# EAGLE board UniRF-Rev01 (EAGLE 7.3.0)
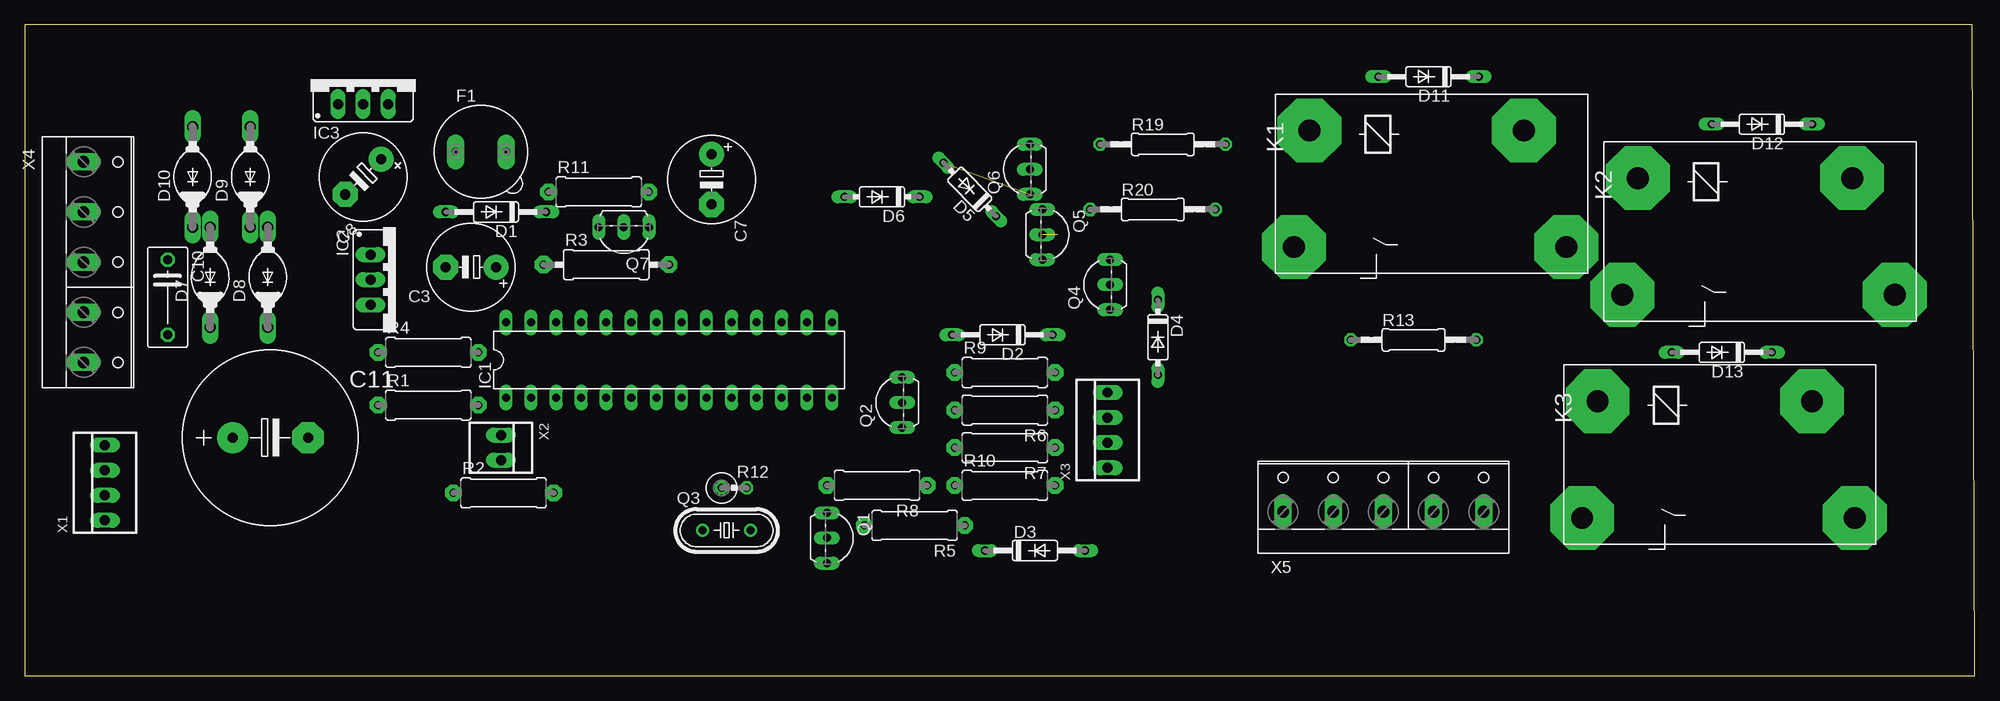
[diagram p0: board, top side]
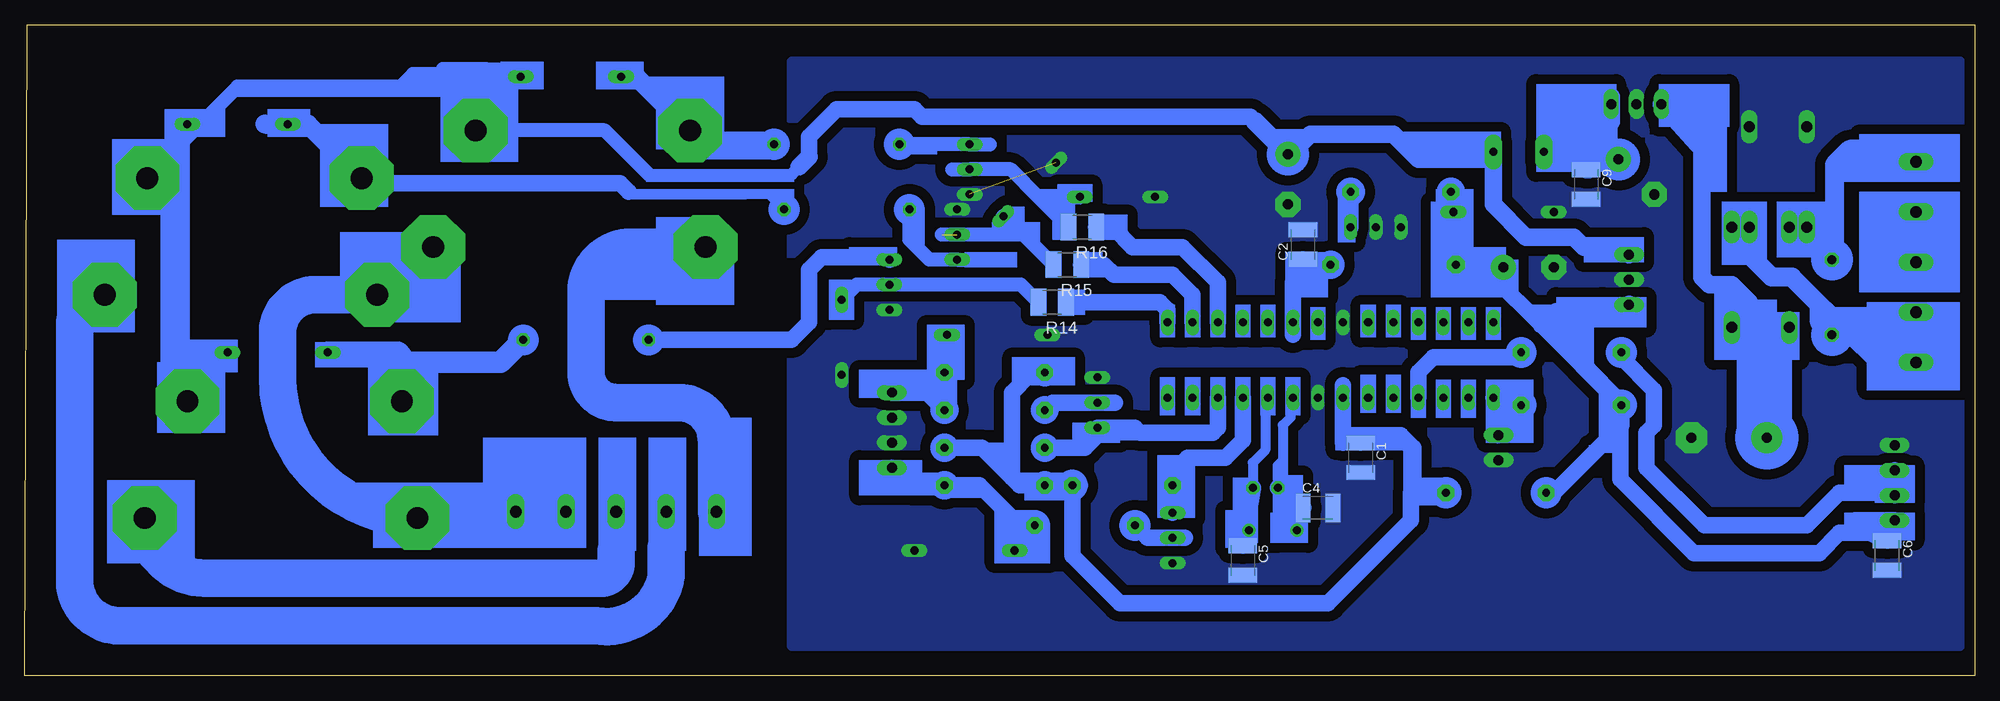
[diagram p1: board, bottom side, seen from below]

Size 197.59 x 65.96 mm. Coordinates in mm from the lower left corner, seen from the top.
Outline: 0,0 197.59,0 197.34,65.96 0,65.96 0,0
Copper layers (1*16): Top 0.035mm / dielectric 1.5mm / Bottom 0.035mm
Design rules "default": minimum track width 10mil, minimum drill 24mil, track to track 8mil, track to pad 8mil, pad to pad 8mil, via to via 8mil, smd to smd 8mil, copper to edge 40mil, drill to drill 8mil, minimum pad ring 10mil, minimum via ring 8mil, stop-mask expansion 4mil, vias tented up to drill 0mil, thermal gap 10mil

## Footprints (pad centres in the part's own frame; a part is rotated, then mirrored left to right if it is on the bottom)
C1210K = smd 1.5 x 2.9: 1 -1.5,0; 2 1.5,0
E5-8,5 = drill 1.016 pad 2.54: + -2.54,0 | drill 1.016 pad 2.54 octagon: - 2.54,0
C075-042X103 = drill 0.914 octagon: 1 -3.81,0; 2 3.81,0
E7,5-18 = drill 1.016 pad 3.15: + -3.81,0 | drill 1.016 pad 3.15 octagon: - 3.81,0
DO35-10 = drill 0.813 long: A 5.08,0; C -5.08,0
DO35-7 = drill 0.813 long: A 3.81,0; C -3.81,0
DO204-10 = drill 1.118 long: A 5.08,0; C -5.08,0
19560 = drill 0.813 pad 1.778 long: 1 -2.54,0; 2 2.54,0
DIL28-3 = drill 0.813 long: 1 -16.51,-3.81; 2 -13.97,-3.81; 3 -11.43,-3.81; 4 -8.89,-3.81; 5 -6.35,-3.81; 6 -3.81,-3.81; 7 -1.27,-3.81; 8 1.27,-3.81; 9 3.81,-3.81; 10 6.35,-3.81; 11 8.89,-3.81; 12 11.43,-3.81; 13 13.97,-3.81; 14 16.51,-3.81; 15 16.51,3.81; 16 13.97,3.81; 17 11.43,3.81; 18 8.89,3.81; 19 6.35,3.81; 20 3.81,3.81; 21 1.27,3.81; 22 -1.27,3.81; 23 -3.81,3.81; 24 -6.35,3.81; 25 -8.89,3.81; 26 -11.43,3.81; 27 -13.97,3.81; 28 -16.51,3.81
78XXS = drill 1.016 long: GND 0,-2.54; IN -2.54,-2.54; OUT 2.54,-2.54
G2RA = drill 2.2 pad 6.452 octagon: 1 -0.762,-5.461; 2 -5.08,6.35; P 22.53,6.35; S 20.955,-5.461
TO92-EBC = drill 0.813 long: B 0,-1.27; C -2.54,-1.27; E 2.54,-1.27
HC49/S = drill 0.813: 1 -2.413,0; 2 2.413,0
0309/10 = drill 0.8 pad 1.676 octagon: 1 -5.08,0; 2 5.08,0
0309/12 = drill 0.8 pad 1.778 octagon: 1 -6.35,0 | drill 0.8 pad 1.676 octagon: 2 6.35,0
0309V = drill 0.813 octagon: 1 -1.27,0; 2 1.27,0
0207/12 = drill 0.813 octagon: 1 -6.35,0; 2 6.35,0
R1210 = smd 1.6 x 2.7: 1 -1.4,0; 2 1.4,0
22-23-2041 = drill 1 long: 1 -3.81,0; 2 -1.27,0; 3 1.27,0; 4 3.81,0
22-23-2021 = drill 1 long: 1 -1.27,0; 2 1.27,0
W237-5P = drill 1.194 long: 1 -10.16,-0.635; 2 -5.08,-0.635; 3 0,-0.635; 4 5.08,-0.635; 5 10.16,-0.635

## Placement (x,y rotation side)
C1  .1  [C1210K]  62.23,22.1 270 bottom
C2  .1  [C1210K]  68.07,43.69 90 bottom
C3  47uF  [E5-8,5]  45.21,41.4 180 top
C4  22pF  [C1210K]  66.55,17.02 0 bottom
C5  22pF  [C1210K]  74.17,11.68 270 bottom
C6  .1  [C1210K]  8.89,12.19 270 bottom
C7  47uF  [E5-8,5]  69.6,50.29 270 top
C8  47uF  [E5-8,5]  34.29,50.55 224.6 top
C9  .1  [C1210K]  39.37,49.78 270 bottom
C10  .1  [C075-042X103]  14.48,38.35 270 top
C11  2200uF  [E7,5-18]  24.89,24.13 0 top
D1  TVS_5V  [DO35-10]  47.75,46.99 180 top
D2  TVS_5V  [DO35-10]  99.06,34.54 180 top
D3  TVS_5V  [DO35-10]  102.36,12.7 0 top
D4  9V1  [DO35-7]  114.81,34.29 270 top
D5  9V1  [DO35-7]  95.76,49.28 134.6 top
D6  9V1  [DO35-7]  86.87,48.51 180 top
D7  4007  [DO204-10]  18.8,40.39 90 top
D8  4007  [DO204-10]  24.64,40.39 90 top
D9  4007  [DO204-10]  22.86,50.55 90 top
D10  4007  [DO204-10]  17.02,50.55 90 top
D11  4007  [DO35-10]  142.24,60.71 180 top
D12  4007  [DO35-10]  176.02,55.88 180 top
D13  4007  [DO35-10]  171.96,32.77 180 top
F1  1A  [19560]  46.23,53.09 0 top
IC1  ATmega328p  [DIL28-3]  65.28,32 0 top
IC2  7805  [78XXS]  37.59,40.13 270 top
IC3  7812  [78XXS]  34.29,60.45 0 top
K1  ALF1P12  [G2RA]  151.13,49.78 180 top
K2  ALF1P12  [G2RA]  184.4,44.96 180 top
K3  ALF1P12  [G2RA]  180.34,22.35 180 top
Q1  BC546  [TO92-EBC]  82.55,13.97 270 top
Q2  BC546  [TO92-EBC]  87.63,27.69 90 top
Q3  16MHz  [HC49/S]  71.12,14.73 0 top
Q4  2106  [TO92-EBC]  108.71,39.62 90 top
Q5  2106  [TO92-EBC]  104.39,44.7 270 top
Q6  2106  [TO92-EBC]  100.58,51.31 90 top
Q7  3LED  [TO92-EBC]  60.71,44.2 180 top
R1  10K  [0309/10]  40.89,27.43 0 top
R2  BEAD  [0309/10]  48.51,18.54 0 top
R3  BEAD  [0309/12]  58.93,41.66 0 top
R4  100  [0309/10]  40.89,32.77 0 top
R5  330  [0309/10]  90.17,15.24 180 top
R6  330  [0309/10]  99.31,26.92 180 top
R7  1K  [0309/10]  99.31,23.11 180 top
R8  1K  [0309/10]  86.36,19.3 180 top
R9  470  [0309/10]  99.31,30.73 0 top
R10  470  [0309/10]  99.31,19.3 0 top
R11  2K7  [0309/10]  58.17,49.02 0 top
R12  1M  [0309V]  71.88,19.05 0 top
R13  0  [0207/12]  140.72,34.04 0 top
R14  1K  [R1210]  93.47,37.85 180 bottom
R15  1K  [R1210]  91.95,41.66 180 bottom
R16  1K  [R1210]  90.42,45.47 180 bottom
R19  0  [0207/12]  115.32,53.85 0 top
R20  0  [0207/12]  114.3,47.24 0 top
X1  RX_MOD  [22-23-2041]  8.13,19.56 90 top
X2  RESET  [22-23-2021]  48.26,23.11 270 top
X3  SWITCH  [22-23-2041]  109.73,24.89 90 top
X4  [W237-5P]  6.6,41.91 270 top
X5  [W237-5P]  137.67,17.27 0 top

## Library data of the parts
C1-C11 R1-R16 R19 R20 = resistor
D1-D13 = diode
F1 = fuse; MPN: 56000001009; OC_FARNELL: 1185363; OC_NEWARK: 15P8392
IC1 = ic-package
IC2 IC3 = v-reg
K1-K3 = relay; OC_FARNELL: unknown; OC_NEWARK: unknown
Q1 Q2 Q4-Q7 = transistor-npn
Q3 = crystal; OC_FARNELL: 1667008; OC_NEWARK: unknown
X1 X3 = con-molex; MF: MOLEX; MPN: 22-23-2041; OC_FARNELL: 1462920; OC_NEWARK: 38C0355
X2 = con-molex; MF: MOLEX; MPN: 22-23-2021; OC_FARNELL: 1462926; OC_NEWARK: 25C3832
X4 X5 = con-wago-508; OC_FARNELL: unknown; OC_NEWARK: unknown

## Nets
GND: C1.2 C2.2 C3.- C4.2 C5.2 C6.2 C7.- C8.- C9.2 C11.- D1.A D2.A D3.A D4.A D5.A D6.A D9.A D10.A IC1.8 IC1.22 IC2.GND IC3.GND Q1.E Q2.E Q4.C Q5.C Q6.C Q7.B Q7.E X1.4 X2.2 X3.2 X3.3
N$1: D4.C Q4.B R14.2
N$2: IC1.1 R1.2 X2.1
N$3: IC1.4 R4.2
N$4: C2.1 IC1.20 R3.2
N$5: R4.1 X1.2 X1.3
N$7: IC1.11 Q1.C R8.2
N$8: Q1.B R5.2
N$9: C3.+ C6.1 D1.C IC2.OUT R1.1 R2.1 R3.1 R11.1 X1.1
N$10: Q2.B R6.2
N$11: IC1.12 Q2.C R7.2
N$12: C1.1 IC1.7 R2.2 R7.1 R8.1 R9.1 R10.1
N$13: C4.1 IC1.9 Q3.1 R12.1
N$14: C5.1 IC1.10 Q3.2 R12.2
N$15: D3.C R5.1 R10.2 X3.1
N$16: D2.C R6.1 R9.2 X3.4
N$17: D6.C Q6.B R16.2
N$18: IC1.15 R14.1
N$19: IC1.16 R15.1
N$20: IC1.17 R16.1
N$21: D5.C Q5.B R15.2
N$22: Q7.C R11.2
N$24: C7.+ D11.C D12.C D13.C F1.2 IC2.IN K1.1 K2.1 K3.1
N$25: C8.+ C9.1 F1.1 IC3.OUT
N$26: C10.2 D8.A D9.C X4.4 X4.5
N$27: Q4.E R13.1
N$28: Q5.E R20.1
N$29: Q6.E R19.1
N$30: C10.1 D7.A D10.C X4.1
N$31: C11.+ D7.C D8.C IC3.IN
N$32: D13.A K3.S R13.2
N$33: D11.A K1.S R19.2
N$36: K2.2 X5.2
N$37: X4.2 X4.3
N$38: D12.A K2.S R20.2
N$39: K1.P X5.1
N$42: K3.2 X5.3
N$43: K1.2 K2.P K3.P X5.4 X5.5

## Tracks (layer width: path | path; a pad name or v marks a point on that pad's centre or on a via)
GND  (1 unrouted)
  pour Bottom (isolate 1.016, no thermals): 1.52,62.23 119.89,62.23 119.89,3.05 1.52,3.05
N$1
  Bottom 1.422: R14.2 96.65,39.62 Q4.B 113.28,39.62 D4.C
N$2
  Bottom 1.676: R1.2 46.74,28.19 48.01,28.19 | 48.01,28.19 IC1.1 | X2.1 48.01,24.64 48.01,28.19
N$3
  Bottom 1.676: IC1.4 56.39,30.73 54.86,32.26 46.48,32.26 R4.2
N$4
  Bottom 1.676: 69.09,34.54 IC1.20 69.09,39.88 68.07,40.89 | R3.2 66.04,40.89 68.07,40.89 | 68.07,40.89 C2.1
N$5
  Bottom 1.676: X1.2 X1.3 9.4,19.56 9.4,19.3 10.16,18.54 13.72,18.54 17.02,15.24 27.43,15.24 33.27,21.08 33.27,24.64 32.51,25.4 32.51,28.96 35.81,32.26 R4.1
N$6
  Bottom 1.676: 36.32,27.94 36.32,28.19 39.12,30.99
N$7
  Bottom 1.676: IC1.11 74.17,23.88 75.95,22.1 79.76,22.1 81.28,20.57 R8.2 Q1.C
N$8
  Bottom 1.676: 80.01,13.97 Q1.B 83.82,13.97 R5.2
N$9
  Bottom 1.676: R1.1 43.94,35.56 48.77,40.39 C3.+ R3.1 52.58,45.97 52.7,46.45 | R1.1 35.81,25.4 35.94,25.27 | 35.94,25.27 42.67,18.54 R2.1 | 52.7,46.45 D1.C 53.09,45.97 | 35.31,27.18 35.56,27.43 R1.1 | R11.1 52.7,49.02 52.7,46.45 | X1.1 12.17,15.75 C6.1 10.69,14.48 13.72,14.48 15.75,12.45 28.45,12.45 35.94,19.94 35.94,25.27
  Bottom 1.778: 42.42,36.83 43.69,35.56 43.94,35.56
  Bottom 1.93: IC2.OUT 35.81,36.83 42.42,36.83
N$10
  Bottom 1.676: 87.12,27.69 Q2.B 93.47,27.69 R6.2
N$11
  Bottom 1.676: R7.2 90.17,23.11 88.9,24.38 Q2.C 85.09,25.15 84.58,24.64 77.22,24.64 76.71,25.15 IC1.12
N$12
  Bottom 1.676: R7.1 100.58,23.11 97.54,20.07 | 97.54,20.07 96.77,19.3 R10.1 R8.1 | 97.54,20.07 97.54,28.7 95.76,30.48 94.49,30.48 R9.1 92.46,30.73 | R2.2 56.9,18.54 | 56.9,18.54 57.15,18.54 | 57.15,18.54 57.15,15.75 65.53,7.37 86.61,7.37 91.44,12.19 R8.1 | 63.75,23.88 63.25,24.38 | 63.25,24.38 61.72,24.38 | 61.72,24.38 58.42,24.38 | 58.42,24.38 58.17,24.38 56.9,23.11 56.9,22.86 | 56.9,18.8 56.9,18.54 | C1.1 61.72,24.11 61.72,24.38 | 64.01,29.46 IC1.7 64.01,23.62 63.75,23.88 | 63.75,23.88 63.75,24.13 63.5,24.38 63.25,24.38 | 58.42,24.38 56.9,22.86 | 56.9,22.86 56.9,18.8 | 56.9,18.8 57.15,18.54 | 90.68,19.3 R8.1
N$13
  Bottom 1.016: IC1.9 69.34,27.94 69.34,26.16 70.1,25.4 70.1,21.84 70.61,21.34 R12.1 70.61,18.8
  Bottom 1.676: R12.1 70.61,19.07 C4.1 69.83,14.83 Q3.1
N$14
  Bottom 1.016: IC1.10 71.88,28.19 71.88,22.86 73.15,21.59 R12.2
  Bottom 1.676: R12.2 C5.1 74.7,14.88 Q3.2
N$15
  Bottom 1.676: R5.1 96.58,14.5 | 96.58,14.5 D3.C | X3.1 107.95,19.3 R10.2 100.84,19.3 96.77,15.24 96.77,14.7 96.58,14.5
N$16
  Bottom 1.676: X3.4 106.17,28.7 R6.1 R9.2 104.14,30.99 D2.C
N$17
  Bottom 1.422: R16.2 94.81,48.45 | 94.81,48.45 97.67,51.31 Q6.B 103.63,51.31 | D6.C 90.74,48.45 94.81,48.45
N$18
  Bottom 1.676: R14.1 82.55,37.85 81.79,37.08 IC1.15
N$19
  Bottom 1.676: IC1.16 79.25,38.61 81.28,40.64 87.25,40.64 88.26,41.66 R15.1
N$20
  Bottom 1.676: IC1.17 76.71,39.88 80.26,43.43 85.34,43.43 87.25,45.34 R16.1
N$21  (1 unrouted)
  Bottom 1.422: R15.2 96.4,44.7 98.55,44.7 | D5.C 98.55,46.44 98.55,44.7 | 98.55,44.7 104.65,44.7
N$22
  Bottom 1.676: Q7.C R11.2
N$24
  Bottom 1.016: 119.89,50.8 134.37,50.8
  Bottom 1.27: 119.13,51.56 119.89,50.8
  Bottom 1.422: 134.37,50.8 138.81,55.25 K1.1 | D11.C 147.57,60.45 151.89,60.45 150.88,61.47 | 150.88,61.47 147.32,61.47 | 150.88,61.47 155.19,61.47 154.43,60.71 153.16,60.71 153.42,60.96 158.24,60.96 159.51,59.69 176.02,59.69 179.83,55.88 | 179.83,55.88 185.17,50.55 K2.1 | 179.83,55.88 D12.C
  Bottom 1.676: 72.9,56.13 73.41,56.64 106.68,56.64 107.44,57.4 115.32,57.4 118.11,54.61 118.11,52.58
  Bottom 1.778: IC2.IN 35.81,43.43 39.62,43.43 40.64,44.45 45.47,44.45 48.77,47.75 F1.2 49.53,52.32 56.39,52.32 58.93,54.86 67.31,54.86 69.34,52.83 C7.+ | 118.11,52.58 119.13,51.56
  Bottom 1.93: C7.+ 72.9,56.13 | K2.1 182.88,48.13 182.88,32.51 | 182.88,32.51 182.88,29.97 181.1,28.19 K3.1 | D13.C 177.8,32 182.12,32 181.36,32.77 177.29,32.77 177.55,32.51 182.88,32.51 | 151.89,60.45 K1.1
N$25
  Bottom 1.778: 37.08,53.31 C8.+ 36.86,53.09 F1.1 | 37.08,53.31 37.08,58.93 36.83,58.67 IC3.OUT 36.83,56.13 | 37.08,53.31 39.11,51.28 C9.1
N$26
  Bottom 1.93: C10.2 15.75,35.81 15.75,37.59 | 15.75,37.59 18.54,40.39 20.57,40.39 23.62,43.43 23.62,45.47 D9.C D8.A | X4.4 X4.5 7.75,29.97 15.75,37.59
N$27
  Bottom 1.676: Q4.E 110.24,42.42 116.84,42.42 118.11,41.15 118.11,35.81 119.89,34.04 R13.1
N$28
  Bottom 1.422: 101.35,42.16 Q5.E 105.92,42.16 107.95,44.2 R20.1
N$29
  Bottom 1.422: 99.82,53.85 Q6.E R19.1
N$30
  Bottom 1.93: D7.A D10.C 17.02,44.7 C10.1 14.48,42.93 14.22,43.18 14.22,51.82 12.7,53.34 6.48,53.34 X4.1
N$31
  Bottom 1.778: 22.86,35.31 22.86,37.85 24.64,39.62 26.92,39.62 27.69,40.39 27.69,53.34 IC3.IN
  Bottom 1.93: C11.+ 21.84,27.43 21.84,35.56 | 21.84,35.56 21.59,35.31 D7.C | 21.84,35.56 22.1,35.31 22.86,35.31 D8.C
N$32
  Bottom 2.184: R13.2 149.35,31.75 158.24,31.75 159.38,30.61 | 159.38,30.61 K3.S | D13.A 159.77,32.77 159.38,32.38 159.38,30.61
N$33
  Bottom 1.016: R19.2 124.46,53.09 128.52,53.09 130.18,54.74 K1.S
  Bottom 1.676: 128.14,56.77 128.02,56.9
  Bottom 1.93: 138.68,60.71 D11.A 135.64,60.71 K1.S 128.14,56.77
N$36
  Bottom 1.676: X5.2 arc-90 132.59,16.38 132.59,12.95
  Bottom 3.81: 132.59,12.95 132.59,10.16 arc90 139.7,5.08 187.96,5.08 arc90 192.53,9.65 192.53,35.56 arc90 K2.2
N$37
  Bottom 1.93: X4.2 X4.3
N$38
  Bottom 1.016: R20.2 122.17,48.77 136.4,48.77 136.4,49.02
  Bottom 1.676: 136.4,49.02 137.29,49.91 161.67,49.91
  Bottom 1.93: K2.S 163.83,50.8 | 163.83,50.8 168.91,55.88 D12.A 173.23,55.88 | 161.54,49.78 161.67,49.91 162.31,50.55 164.08,50.55 163.83,50.8
N$39
  Bottom 3.81: X5.1 127.51,23.88 arc-90 131.32,27.69 137.67,27.69 arc90 140.72,30.73 140.72,38.86 arc90 136.14,43.43 K1.P
N$42
  Bottom 1.676: 137.67,12.7 X5.3
  Bottom 3.81: 137.67,12.7 137.67,11.43 arc90 139.19,9.91 179.32,9.91 arc90 K3.2
N$43
  Bottom 3.81: X5.4 X5.5 arc90 148.46,16 K3.P arc90 171.96,30.15 171.96,34.8 arc90 168.15,38.61 K2.P arc90 157.05,43.43 K1.2
(copper drawn outside any net)
  shapes: Bottom area x247, Bottom circle x35